# Altium PCB linkit-v4-0.3_6layers.PcbDoc (part 3 of 6)
Units mm, origin at the board's own origin, x right, y up, seen from the top; angles counter-clockwise.
Board outline 70 x 35 mm, 6 copper layers (Top Layer, Int1 (GND), Int2 (Sign), Int3 (Sign), Int4 (PWR), Bottom Layer), stack 1.551 mm thick; 185 components, 156 nets, 761 pads, 1071 vias.
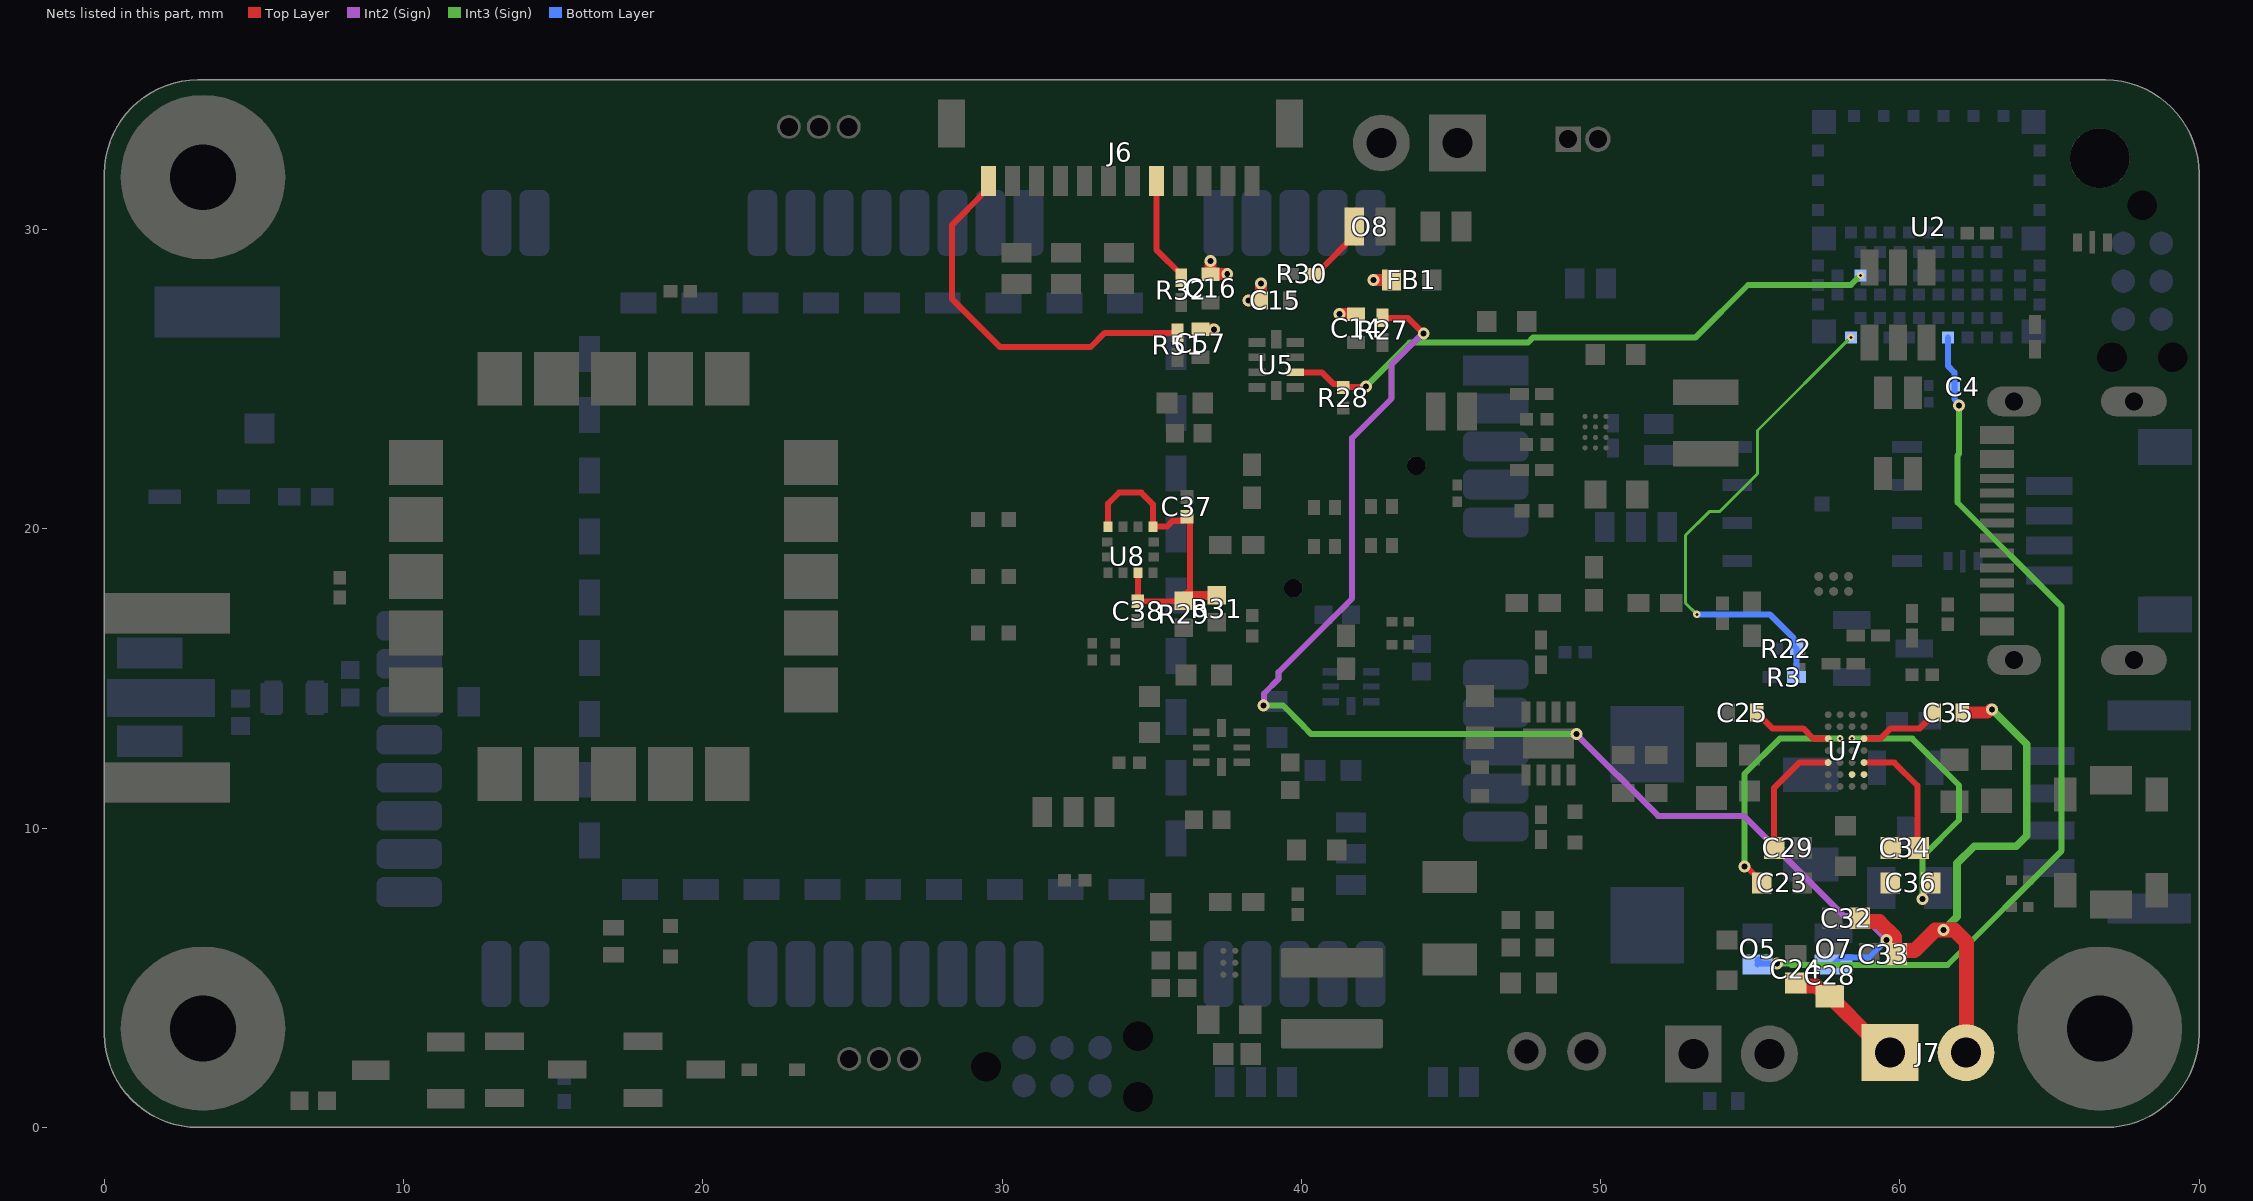
[diagram p6: the nets of this part, all layers, seen from the top]

## Part data (continued)
R18 R19 R20 R21 R22: "Thick Film Resistors - SMD 10 MOhms 50mW 0201 1%", Manufacturer_Name=KEMET, Mouser Part Number=603-RC0201FR-0710ML, Arrow Part Number=RC0201FR-0710ML, Arrow Price/Stock=https://www.arrow.com/en/products/rc0201fr-0710ml/yageo, Datasheet Link=http://www.yageo.com/documents/recent/PYu-RC0201_51_RoHS_L_8.pdf, Height=0.26mm, Manufacturer_Part_Number=RC0201FR-0710ML, Mouser Price/Stock=https://www.mouser.com/Search/Refine.aspx?Keyword=603-RC0201FR-0710ML
R23: library part "RES 750R 0201 1% 100PPM", "RES 750R 0201 1% 100PPM", Supplier Part Number 1=71-CRCW0201750RFKED, Tolerance=1%, PPM=100, Size=0201, Supplier 1=Mouser, Supplier 2=Digi-Key, Supplier Part Number 2=541-750AABCT-ND
R24: library part "RES 330R 0201 1% 100PPM", "RES 330R 0201 1% 100PPM", Supplier Part Number 1=71-CRCW0201330RFKED, Tolerance=1%, PPM=100, Size=0201, Supplier 1=Mouser, Supplier 2=Digi-Key, Supplier Part Number 2=541-330AABCT-ND
R25: library part "RES 1.6K 0201 1% 100PPM", "RES 1.6K 0201 1% 100PPM", Supplier Part Number 1=71-CRCW02011K60FKED, Tolerance=1%, PPM=100, Size=0201, Supplier 1=Mouser, Supplier 2=Digi-Key, Supplier Part Number 2=541-1.60KAABCT-ND
R26: library part RES-NC-0402, "Generic Resistor, Not Fitted", Manufacturer=YAGEO, Manufacturer_Part_Number=RC0402JR-070RL, Package=R0402, ComponentLink1Description=Datasheet, ComponentLink1URL=http://tunmcdsvn.tun.st.com/Component_Datasheet_Library/Trunk/Resistors/Yageo_Resistor_RC0402-series, Initial_Board_Reference=MB1274, Internal_Part_Number=MCD-00052, part_type=Resistor, Provided_By=SUBCO, status=Released
R31: library part "RES 0R 0402", "RES 0R 0402", Supplier Part Number 1=603-RC0402JR-070RL, Size=0402, Supplier 1=Mouser, Supplier 2=Digi-Key, Supplier Part Number 2=311-0.0JRCT-ND
R33 R34: "Thick Film Resistors - SMD 1/20watt 5.1Kohms 5% 200ppm", Manufacturer_Name=Vishay, Mouser Part Number=71-CRCW02015K10JNED, Datasheet Link=http://www.vishay.com/docs/20035/dcrcwe3.pdf, Height=0.28mm, Manufacturer_Part_Number=CRCW02015K10JNED, Mouser Price/Stock=https://www.mouser.com/Search/Refine.aspx?Keyword=71-CRCW02015K10JNED
R35: library part CRCW04020000Z0EEHP, "Thick Film Resistors - SMD CRCW 402 jumper", Manufacturer_Name=Vishay, Mouser Part Number=71-CRCW04020000Z0EEH, Arrow Part Number=CRCW04020000Z0EEHP, Arrow Price/Stock=https://www.arrow.com/en/products/crcw04020000z0eehp/vishay?utm_currency=USD&region=nac, Datasheet Link=http://www.vishay.com/docs/20035/dcrcwe3.pdf, Height=0.4mm, Manufacturer_Part_Number=CRCW04020000Z0EEHP, Mouser Price/Stock=https://www.mouser.co.uk/ProductDetail/Vishay-Dale/CRCW04020000Z0EEHP?qs=Imq1NPwxi74NTc567q7flQ%3D%3D
R36: "Res Thick Film 0201 453 Ohm 1% 1/20W ±100ppm/°C Molded SMD SMD Paper T/R", Case Code (Imperial)=0201, Case Code (Metric)=0603, Manufacturer="Vishay Dale", Manufacturer Part Number=CRCW0201453RFKED, Manufacturer_Name=Vishay, Max Operating Temperature=155°C, Max Power Dissipation=50mW, Min Operating Temperature=-55°C, Mouser Part Number=71-CRCW020120K0FKED, Package Quantity=10000, Supplier Part Number=71-CRCW0201453RFKED, Temperature Coefficient=100ppm/°C, Tolerance=1%, Voltage Rating=30V, Arrow Part Number=CRCW020120K0FKED, Arrow Price/Stock=https://www.arrow.com/en/products/crcw020120k0fked/vishay, Case/Package=0201, Category="Chip SMD Resistors", ComponentLink1Description=https://datasheet.ciiva.com/8935/crcw0201e3-8935846.pdf?src-supplier=Avnet, ComponentLink1URL=https://datasheet.ciiva.com/8935/crcw0201e3-8935846.pdf?src-supplier=Avnet, ComponentLink2Description=https://datasheet.ciiva.com/2580/crcw0201e3-2580478.pdf?src-supplier=Digikey, ComponentLink2URL=https://datasheet.ciiva.com/2580/crcw0201e3-2580478.pdf?src-supplier=Digikey, Contact Plating=Tin, Datasheet Link=http://www.vishay.com/docs/20035/dcrcwe3.pdf, Height=0.28mm, Lead Free="Lead Free", Length=0.024inch, Manufacturer_Part_Number=CRCW020120K0FKED, Mouser Price/Stock=https://www.mouser.co.uk/ProductDetail/Vishay-Dale/CRCW020120K0FKED?qs=1%252BOKmYoxJmkUY7PW7c9G2g%3D%3D, Number of Terminations=2, Packaging="Tape and Reel", Power Rating=50mW, Pricing="1=0,21, 10=0,091, 50=0,091, 100=0,063, 1000=0,043, 10000=0,029 (USD)", Radiation Hardening=No, RoHS=Yes, RoHS Compliant=Yes, Series=CRCW, Stock=8250, Supplier=Mouser, Termination=SMD/SMT, Voltage Rating (DC)=30V, Weight=6E-06oz, Width=0.3mm
R37: "Thick Film Resistors - SMD 10 kOhms 50 mW 0201 1%", Manufacturer_Name=KEMET, Mouser Part Number=603-RC0201FR-7D10KL, Datasheet Link=http://www.yageo.com/documents/recent/PYu-RC0201_51_RoHS_L_8.pdf, Height=0.26mm, Manufacturer_Part_Number=RC0201FR-7D10KL, Mouser Price/Stock=https://www.mouser.co.uk/ProductDetail/YAGEO/RC0201FR-7D10KL?qs=F5EMLAvA7ICAEt2%2Fo%2FBSlA%3D%3D
R38: "Thick Film Resistors - SMD 0201 255ohm 1% HalogenFree AEC-Q200", Manufacturer_Name=Panasonic, Datasheet Link=https://industrial.panasonic.com/cdbs/www-data/pdf/RDA0000/AOA0000C301.pdf, Height=0.26mm, Manufacturer_Part_Number=ERJ-1GNF2550C
R39: "Thick Film Resistors - SMD 1/20watt 196ohms 1% 100ppm"
R40 R42: "Thick Film Resistors - SMD 1/20watt 470ohms 1% 200ppm", Manufacturer_Name=Panasonic, Mouser Part Number=667-ERJ-U02F4700X, Datasheet Link=https://industrial.panasonic.com/cdbs/www-data/pdf/RDP0000/AOA0000C334.pdf, Height=0.4mm, Manufacturer_Part_Number=ERJ-U02F4700X, Mouser Price/Stock=https://www.mouser.co.uk/ProductDetail/Panasonic/ERJ-U02F4700X?qs=CBysBIMljtjEviQOZxHkmQ%3D%3D
R41: "Thick Film Resistors - SMD 1/16watt 3.3Kohms 1% 100ppm", Manufacturer_Name=Vishay, Mouser Part Number=71-CRCW0402-3.3K-E3, Arrow Part Number=CRCW04023K30FKED, Arrow Price/Stock=https://www.arrow.com/en/products/crcw04023k30fked/vishay, Datasheet Link=http://www.vishay.com/docs/20035/dcrcwe3.pdf, Height=0.4mm, Manufacturer_Part_Number=CRCW04023K30FKED, Mouser Price/Stock=https://www.mouser.co.uk/ProductDetail/Vishay-Dale/CRCW04023K30FKED?qs=iv%252Be0Bc5VY2uvlCcTQHBWQ%3D%3D
R43 R44: "Thick Film Resistors - SMD 1/20watt 22ohms 1% 200ppm", Manufacturer_Name=Panasonic, Datasheet Link=https://industrial.panasonic.com/cdbs/www-data/pdf/RDP0000/AOA0000C334.pdf, Height=0.4mm, Manufacturer_Part_Number=ERJ-U02F22R0X
R45: "Thick Film Resistors - SMD 36.5Kohm 1% 200ppm", Manufacturer_Name=Vishay, Datasheet Link=http://www.vishay.com/docs/20035/dcrcwe3.pdf, Height=0.28mm, Manufacturer_Part_Number=CRCW020136K5FNED
R46 R49: "Thick Film Resistors - SMD 0 Ohms 50mW 0201 1%", Manufacturer_Name=KEMET, Mouser Part Number=603-RC0201FR-070RL, Arrow Part Number=RC0201FR-070RL, Arrow Price/Stock=https://www.arrow.com/en/products/rc0201fr-070rl/yageo?region=nac, Datasheet Link=http://www.yageo.com/documents/recent/PYu-RC0201_51_RoHS_L_8.pdf, Height=0.26mm, Manufacturer_Part_Number=RC0201FR-070RL, Mouser Price/Stock=https://www.mouser.co.uk/ProductDetail/YAGEO/RC0201FR-070RL?qs=LWWr1WFOkdETHfAClQk8Xg%3D%3D
R47: "Thick Film Resistors - SMD 1/20W 2.74Kohms 1% 200ppm", Manufacturer_Name=Vishay, Datasheet Link=http://www.vishay.com/docs/20035/dcrcwe3.pdf, Height=0.28mm, Manufacturer_Part_Number=CRCW02012K74FNED
R48: "Thick Film Resistors - SMD 1/20watt 100Kohms 5% 200ppm", Manufacturer_Name=Vishay, Mouser Part Number=71-CRCW0201100KJNED, Arrow Part Number=CRCW0201100KJNED, Arrow Price/Stock=https://www.arrow.com/en/products/crcw0201100kjned/vishay, Datasheet Link=http://www.vishay.com/docs/20035/dcrcwe3.pdf, Height=0.28mm, Manufacturer_Part_Number=CRCW0201100KJNED, Mouser Price/Stock=https://www.mouser.co.uk/ProductDetail/Vishay-Dale/CRCW0201100KJNED?qs=IQLUlsvFoXu8A8gHIw6owA%3D%3D
R50: "Thick Film Resistors - SMD 1/16watt 49.9Kohms 1%", Manufacturer_Name=Vishay, Mouser Part Number=71-CRCW0402-49.9K-E3, Arrow Part Number=CRCW040249K9FKED, Arrow Price/Stock=https://www.arrow.com/en/products/crcw040249k9fked/vishay?region=nac, Datasheet Link=http://www.vishay.com/docs/20035/dcrcwe3.pdf, Height=0.4mm, Manufacturer_Part_Number=CRCW040249K9FKED, Mouser Price/Stock=https://www.mouser.co.uk/ProductDetail/Vishay-Dale/CRCW040249K9FKED?qs=hAuyw6LW%252BLhwjtjsHx%2FGDQ%3D%3D
R52 R53 R54 R55 R56: "Thick Film Resistors - SMD CRCW 402 jumper", Manufacturer_Name=Vishay, Mouser Part Number=71-CRCW04020000Z0EEH, Arrow Part Number=CRCW04020000Z0EEHP, Arrow Price/Stock=https://www.arrow.com/en/products/crcw04020000z0eehp/vishay?utm_currency=USD&region=nac, Datasheet Link=http://www.vishay.com/docs/20035/dcrcwe3.pdf, Height=0.4mm, Manufacturer_Part_Number=CRCW04020000Z0EEHP, Mouser Price/Stock=https://www.mouser.co.uk/ProductDetail/Vishay-Dale/CRCW04020000Z0EEHP?qs=Imq1NPwxi74NTc567q7flQ%3D%3D
SW1: "Board Mount Hall Effect/Magnetic Sensors Integrated Digital Omnipolar, TMR, High Sensitivity Magnetic Switch, SOT23 Package, Ind Temp, 2Hz", Manufacturer_Name="Allegro MicroSystems", Mouser Part Number=462-CT8132BV-IS3, Datasheet Link=https://www.mouser.fr/datasheet/2/1115/Allegro_DS_CT813x_Datasheet_GS_FINAL_R2_v2-3441103.pdf, Height=1.4mm, Manufacturer_Part_Number=CT8132BV-IS3, Mouser Price/Stock=https://www.mouser.fr/ProductDetail/Allegro-MicroSystems/CT8132BV-IS3?qs=GBLSl2Akirsc7cUAudCqXg%3D%3D
SW2: "SW SPST PB 50MA 12V SMT CK variant", Manufacturer=C&K, Manufacturers Part Number="PTS820J2xM SMTR LFS", Supplier Part Number 1=611-PTS820J25MSMTR, Distributor 1=EBV, Distributor 2="Future Electronics", Supplier 1=Mouser, Supplier 2=Digi-Key, Supplier Part Number 2=CKN10505CT-ND
U1: "Battery Management 800-mA linear batter y charger for one-ce", Manufacturer_Name="Texas Instruments", Mouser Part Number=595-BQ25176MDSGR, Arrow Part Number=BQ25176MDSGR, Arrow Price/Stock=https://www.arrow.com/en/products/bq25176mdsgr/texas-instruments?region=nac, Datasheet Link=https://www.ti.com/lit/gpn/bq25176m, Height=0.8mm, Manufacturer_Part_Number=BQ25176MDSGR, Mouser Price/Stock=https://www.mouser.co.uk/ProductDetail/Texas-Instruments/BQ25176MDSGR?qs=Y0Uzf4wQF3nVhcdITj52nA%3D%3D
U2: "IC ISP Smart Bluetooth Module", Manufacturer=InsightSIP, Manufacturers Part Number=ISP1807-LR-ST, Temp Max=85, Temp Min=-40, Supplier 1=Rutronik, Supplier 2=Mouser, Supplier Part Number 1=ISP1807-LR-ST, Supplier Part Number 2=359-ISP1807-LR-ST, Supplier Unit Price 1=8.5
U3: "IC MEM SERIAL NOR FLASH QSPI 128Mb/16MB 3.6V 166MHz WSON8 6X5", Manufacturer=ISSI, Supplier Part Number 1=2901145, Temp Max=105, Temp Min=-40, Distributor 1=EBV, Distributor 2="Future Electronics", Manufacturers Part Number=IS25LP128F-JKLE, Supplier 1=Farnell, Supplier 2=Mouser, Supplier Part Number 2=870-IS25LP128FJKLETR
U4 U12: "Power Switch ICs - Power Distribution Low Input VTG Dual L oad Switch", Manufacturer_Name="Texas Instruments", Mouser Part Number=595-TPS22960RSER, Arrow Part Number=TPS22960RSER, Arrow Price/Stock=https://www.arrow.com/en/products/tps22960rser/texas-instruments?region=nac, Datasheet Link=https://www.ti.com/lit/ds/symlink/tps22960.pdf?ts=1638681846865&ref_url=https%253A%252F%252Fwww.google.com%252F, Height=0.6mm, Manufacturer_Part_Number=TPS22960RSER, Mouser Price/Stock=https://www.mouser.co.uk/ProductDetail/Texas-Instruments/TPS22960RSER?qs=EQxOuqCyzqQpKHLEcq5RSg%3D%3D
U5: "Analog to Digital Converters - ADC 16B ADC w/ Int MUX P GA Comp Osc & Ref A", Manufacturer_Name="Texas Instruments", Mouser Part Number=595-ADS1115IRUGR, Arrow Part Number=ADS1115IRUGR, Arrow Price/Stock=https://www.arrow.com/en/products/ads1115irugr/texas-instruments?utm_currency=USD&region=nac, Datasheet Link=https://www.ti.com/lit/ds/symlink/ads1115.pdf?ts=1601235703022&ref_url=https%253A%252F%252Fwww.ti.com%252Fproduct%252FADS1115%253FkeyMatch%253DADS1115IRUGR%2526tisearch%253DSearch-EN-everything%2526usecase%253DOPN, Height=0.4mm, Manufacturer_Part_Number=ADS1115IRUGR, Mouser Price/Stock=https://www.mouser.co.uk/ProductDetail/Texas-Instruments/ADS1115IRUGR?qs=IK5e5L0zOXhqw%2F8AHSSbuA%3D%3D
U6: "ESD Suppressors / TVS Diodes High Speed Interface Protection Low Cap", Manufacturer_Name=STMicroelectronics, Mouser Part Number=511-USBLC6-2SC6, Arrow Part Number=USBLC6-2SC6, Arrow Price/Stock=https://www.arrow.com/en/products/usblc6-2sc6/stmicroelectronics?utm_currency=USD&region=europe, Datasheet Link=http://www.st.com/st-web-ui/static/active/en/resource/technical/document/datasheet/CD00050750.pdf, Height=1.45mm, Manufacturer_Part_Number=USBLC6-2SC6, Mouser Price/Stock=https://www.mouser.co.uk/ProductDetail/STMicroelectronics/USBLC6-2SC6?qs=po45yt2pPpu%2FhNIlwQdTlg%3D%3D
U7: "Wireless Charging ICs Wireless Pwr Receivr A 595-BQ51003YFPR", Manufacturer_Name="Texas Instruments", Mouser Part Number=595-BQ51003YFPT, Arrow Part Number=BQ51003YFPT, Arrow Price/Stock=https://www.arrow.com/en/products/bq51003yfpt/texas-instruments?region=nac, Datasheet Link=http://www.ti.com/lit/gpn/BQ51003, Height=0.5mm, Manufacturer_Part_Number=BQ51003YFPT, Mouser Price/Stock=https://www.mouser.co.uk/ProductDetail/Texas-Instruments/BQ51003YFPT?qs=QCUnHQQYO1rX6GZ4rUhwCg%3D%3D
U8: "IC AXL Accel/temp SPI/I2C 12LGA", Manufacturer="Bosch Sensortec", Supplier Part Number 1=828-1081-1-ND, Temp Max=85, Temp Min=-40, Manufacturers Part Number=BMA400, Supplier 1=Digi-Key, Supplier 2=Mouser, Supplier Part Number 2=262-BMA400
U9: "GNSS / GPS Modules u-blox M10 GNSS antenna module ROM, TCXO, SAW, LNA LGA, 16x16 mm", Manufacturer_Name=U-Blox, Mouser Part Number=377-SAM-M10Q-00B, Datasheet Link=https://content.u-blox.com/sites/default/files/documents/SAM-M10Q_DataSheet_UBX-22013293.pdf, Height=6.8mm, Manufacturer_Part_Number=SAM-M10Q-00B, Mouser Price/Stock=https://www.mouser.co.uk/ProductDetail/u-blox/SAM-M10Q-00B?qs=vvQtp7zwQdOaA6LplTUKjg%3D%3D
U10: "Switching Voltage Regulators 5.5-V buck-boost con verter with 75-nA op", Manufacturer_Name="Texas Instruments", Mouser Part Number=595-TPS63901YCJR, Arrow Part Number=TPS63901YCJR, Arrow Price/Stock=https://www.arrow.com/en/products/tps63901ycjr/texas-instruments?region=nac, Datasheet Link=https://www.ti.com/lit/ds/symlink/tps63901.pdf?ts=1658737279065&ref_url=https%253A%252F%252Fwww.ti.com%252Fproduct%252FTPS63901%253FkeyMatch%253DTPS63901YCJR%2526tisearch%253Dsearch-everything%2526usecase%253DOPN, Height=0.35mm, Manufacturer_Part_Number=TPS63901YCJR, Mouser Price/Stock=https://www.mouser.co.uk/ProductDetail/Texas-Instruments/TPS63901YCJR?qs=vvQtp7zwQdNZy3FE2e2hqg%3D%3D
U11: "KIM2 Module 48 pins 1.27mm pitch 36.6 x 25.4 x 5mm", Manufacturer=Kineis, Rating=3.3-5V, Tolerance="-30 /  +55°C", BOI="SMD48 36.6x25.4x5mm", DESIG="KIMFLEX Module 48 pins 1.27mm pitch 36.6 x 25.4 x 5mm", K P/N=-, Manufacturer P/N=KIM2, Supplier=Kineis, Supplier P/N=KIMFLEX, VAL=KIM2
U13: "Arribada SMD module Argos comunication with PA GR5504"
U14: "Switching Voltage Regulators 95-nA low IQ 5.5-V b oost converter with INLIMIT (1.9A)", Manufacturer_Name="Texas Instruments", Mouser Part Number=595-TPS612997YBHR, Arrow Part Number=TPS612997YBHR, Arrow Price/Stock=https://www.arrow.com/en/products/tps612997ybhr/texas-instruments?utm_currency=USD&region=nac, Datasheet Link=https://www.ti.com/lit/gpn/tps61299, Height=0.4mm, Manufacturer_Part_Number=TPS612997YBHR, Mouser Price/Stock=https://www.mouser.co.uk/ProductDetail/Texas-Instruments/TPS612997YBHR?qs=mELouGlnn3dLhnQxUdz5hw%3D%3D

## Via types
v1: diameter 0.4, hole 0.2, Top Layer to Int1 (GND), tented both sides, 275 vias
v2: diameter 0.4 (per signal layer), hole 0.2, Int1 (GND) to Int2 (Sign), tented both sides, 205 vias
v3: diameter 0.4, hole 0.2, Int1 (GND) to Bottom Layer, tented both sides, 147 vias
v4: diameter 0.4/0.4 (per signal layer), hole 0.2, Int1 (GND) to Int3 (Sign), tented both sides, 103 vias
v5: diameter 0.4, hole 0.2, Int3 (Sign) to Bottom Layer, tented both sides, 48 vias
v6: diameter 0.4, hole 0.2, Top Layer to Int3 (Sign), tented both sides, 46 vias
v7: diameter 0.6, hole 0.3, Top Layer to Int4 (PWR), tented both sides, 38 vias
v8: diameter 0.4/0.4/0.4/0.4 (per signal layer), hole 0.2, Top Layer to Bottom Layer, tented both sides, 33 vias
v9: diameter 0.4, hole 0.2, Int1 (GND) to Int2 (Sign), tented both sides, 23 vias
v10: diameter 0.4, hole 0.2, Int2 (Sign) to Bottom Layer, tented both sides, 20 vias
v11: diameter 0.6, hole 0.3, Int4 (PWR) to Bottom Layer, tented both sides, 19 vias
v12: diameter 0.25, hole 0.1, Int2 (Sign) to Bottom Layer, tented both sides, 17 vias
v13: diameter 0.4, hole 0.2, Top Layer to Int2 (Sign), tented both sides, 16 vias
v14: diameter 0.25, hole 0.1, Int3 (Sign) to Bottom Layer, tented both sides, 14 vias
v15: diameter 0.5, hole 0.2, Top Layer to Bottom Layer, tented both sides, 12 vias
v16: diameter 0.4, hole 0.2, Int2 (Sign) to Int3 (Sign), tented both sides, 10 vias
v17: diameter 0.25, hole 0.1, Top Layer to Bottom Layer, tented both sides, 7 vias
v18: diameter 0.6, hole 0.3, Top Layer to Bottom Layer, tented both sides, 6 vias
v19: diameter 0.4, hole 0.2, Top Layer to Bottom Layer, tented both sides, 5 vias
v20: diameter 0.2, hole 0.1, Int2 (Sign) to Bottom Layer, tented both sides, 5 vias
v21: diameter 0.226, hole 0.1, Top Layer to Int3 (Sign), tented both sides, 5 vias
v22: diameter 0.2, hole 0.1, Int1 (GND) to Bottom Layer, tented both sides, 4 vias
v23: diameter 0.6, hole 0.3, Int1 (GND) to Bottom Layer, tented both sides, 3 vias
v24: diameter 0.3, hole 0.2, Top Layer to Int1 (GND), tented both sides, 3 vias
v25: diameter 0.6, hole 0.3, Int3 (Sign) to Bottom Layer, tented both sides, 2 vias
v26: diameter 0.6, hole 0.3, Top Layer to Int1 (GND), tented both sides, 1 vias
v27: diameter 0.4, hole 0.2, Int4 (PWR) to Bottom Layer, tented both sides, 1 vias
v28: diameter 0.6, hole 0.3, Top Layer to Int2 (Sign), tented both sides, 1 vias
v29: diameter 0.25, hole 0.1, Int1 (GND) to Bottom Layer, tented both sides, 1 vias
v30: diameter 0.169, hole 0.1, Top Layer to Int2 (Sign), tented both sides, 1 vias

## Nets (pads, with @x,y where several pads share a name; then routed paths per layer and width w, separated by ;. In a path a pad name is that pad's centre, name@x,y a point inside that pad or via, vN(x,y) a via of type N, cw(c..) or ccw(c..) an arc to the next point about the centre after c; other vN are vias at no path point)
ADC0: O7.2 R27.1 | length 42.4
  Top Layer w0.2: R27.1@42.718,27.052 43.56,27.052 44.077,26.535 v13(44.09,26.535)
  Int2 (Sign) w0.2: v16(38.735,14.097) 38.754,14.116 38.754,14.5 39.243,14.989 39.243,15.216 41.699,17.672 41.699,23.037 43.019,24.357 43.019,25.493 44.061,26.535 v13(44.09,26.535) ; v16(49.19,13.144) 51.92,10.414 54.78,10.414 58.135,7.059 58.77,7.059 v10(59.559,6.27)
  Int3 (Sign) w0.2: v16(38.735,14.097) 39.389,14.097 40.095,13.392 40.095,13.38 40.33,13.144 v16(49.19,13.144)
  Bottom Layer w0.2: O7.2@57.785,5.448 58.015,5.679 58.968,5.679 v10(59.559,6.27)
ADC1: O8.2 R30.1 | length 2.2
  Top Layer w0.2: R30.1@40.428,28.522 40.541,28.522 40.641,28.622 40.641,28.664 41.77,29.794 O8.2@41.77,30.099
ADC2: J6.5 R32.1 | length 3.6
  Top Layer w0.2: J6.5@35.154,31.623 35.154,29.332 35.987,28.499 R32.1@35.987,28.387
ADC3: J6.12 R51.1 | length 12.9
  Top Layer w0.2: J6.12@29.554,31.623 29.554,31.373 29.404,31.223 29.392,31.223 28.33,30.161 28.33,27.677 29.937,26.07 32.954,26.07 33.436,26.552 R51.1@35.864,26.552
ADC_ALERT_RDY: R28.2 U2.64 U5.2 | length 20.7
  Top Layer w0.2: U5.2@39.797,25.228 40.685,25.228 41.069,24.844 41.292,24.844 R28.2@41.402,24.734 ; R28.2@41.402,24.724 R28.2@41.402,24.734 ; v6(42.164,24.765) 42.143,24.744 41.413,24.744 R28.2@41.402,24.734
  Int3 (Sign) w0.2: v6(42.164,24.765) 43.622,26.223 47.572,26.223 47.747,26.398 53.173,26.398 54.924,28.149 58.36,28.149 v14(58.685,28.474)
AGND: C14.2 C15.2 C16.2 C57.2 FB1.1 | length 3.6
  Top Layer w0.4: C57.2@36.626,26.678 36.634,26.67 v1(37.084,26.67) ; v1(36.957,28.956) 36.957,28.523 C16.2@36.967,28.513 v1(37.524,28.513) ; v1(38.227,27.633) C15.2@38.654,27.633 v1(38.654,28.194) ; v1(41.275,27.178) C14.2@41.829,27.178 ; v1(42.418,28.321) FB1.1@43.013,28.321
BAT_AN: C4.2 O5.1 U2.38 | length 30.6
  Int3 (Sign) w0.2: v5(55.899,5.48) 56.335,5.48 56.385,5.43 61.589,5.43 65.405,9.246 65.405,17.399 61.924,20.88 61.924,22.452 61.976,22.504 v5(61.976,24.13)
  Bottom Layer w0.2: O5.1@55.245,5.448 55.277,5.48 v5(55.899,5.48) ; O5.1@55.245,5.575 O5.1@55.285,5.616 ; U2.38@61.61,26.399 61.61,25.436 61.824,25.222 C4.2@61.824,24.752 61.824,24.336 61.976,24.184 v5(61.976,24.13)
BAT_READ_EN: R3.2 R22.2 U2.48 | length 16.8
  Int3 (Sign) w0.1: v14(53.213,17.145) 52.84,17.518 52.84,19.786 53.628,20.574 53.975,20.574 55.245,21.844 55.245,23.284 v14(58.36,26.399)
  Bottom Layer w0.2: v14(53.213,17.145) 55.654,17.145 56.44,16.359 56.44,16.108 R22.2@56.546,16.002 R3.2@56.546,15.047
BMA_PWR: C37.2 C38.2 R29.1 R31.2 U8.3 U8.7 U8.10 | length 11.2
  Top Layer w0.2: U8.10@33.54,20.079 33.54,20.843 33.906,21.209 34.654,21.209 35.04,20.823 U8.7@35.04,20.079 35.515,20.079 35.705,20.269 36.015,20.269 36.025,20.279 36.069,20.279 36.179,20.389 C37.2@36.179,20.409 ; U8.3@34.54,18.529 34.54,17.586 C38.2@34.537,17.582 35.872,17.582 R29.1@35.977,17.686 ; R29.1@36.068,17.595 36.068,17.686 36.068,17.739 36.275,17.946 36.275,20.229 C37.2@36.137,20.367
  Top Layer w0.3: R29.1@36.068,17.595 36.068,17.717 36.129,17.778 R31.2@37.173,17.778
BOOT1: C29.2 U7.C4 | length 4.2
  Top Layer w0.2: C29.2@55.798,9.328 C29.2@55.798,9.338 55.798,11.348 56.642,12.192 U7.C4@57.601,12.192
BOOT2: C34.2 U7.C1 | length 4.2
  Top Layer w0.2: U7.C1@58.801,12.192 59.817,12.192 60.582,11.427 C34.2@60.582,9.328
CLAMP1: C23.2 U7.E3 | length 7.6
  Top Layer w0.2: v6(54.809,8.713) 54.847,8.675 54.906,8.675 55.388,8.193 C23.2@55.388,8.168
  Int3 (Sign) w0.2: v6(54.809,8.713) 54.809,11.813 55.988,12.992 v21(58.001,12.992)
CLAMP2: C36.2 U7.E2 | length 9.2
  Top Layer w0.2: v6(60.759,7.627) 60.759,7.681 60.804,7.726 60.804,7.918 61.029,8.143 C36.2@61.029,8.168
  Int3 (Sign) w0.2: v21(58.401,12.992) 60.414,12.992 61.976,11.43 61.976,10.272 60.759,9.055 v6(60.759,7.627)
COIL-1: C24.1 C28.1 J7.1 | length 4.2
  Top Layer w0.5: C24.1@56.515,4.826 56.61,4.731 57.212,4.731 57.563,4.38 C28.1@57.658,4.38 57.753,4.38 57.878,4.255 57.878,4.16 58.839,3.199 58.97,3.199 J7.1@59.67,2.499
COIL-2: C32.1 C33.1 C34.1 C35.1 C36.1 J7.2 U7.B1 U7.B2 | length 19.4
  Top Layer w0.4: C35.1@62.09,13.862 62.928,13.862 63.027,13.961 v6(63.081,13.961)
  Top Layer w0.5: C32.1@58.661,6.987 58.661,6.972 58.756,6.877 59.312,6.877 59.825,6.364 59.825,5.866 C33.1@59.896,5.795 59.896,5.81 59.991,5.905 60.491,5.905 61.18,6.594 v6(61.453,6.594) 61.819,6.594 62.23,6.182 62.23,2.519 J7.2@62.21,2.499
  Int3 (Sign) w0.254: v6(61.453,6.594) 61.907,7.048 61.907,8.821 62.478,9.392 63.881,9.392 64.235,9.745 64.235,12.807 v6(63.081,13.961)
COMM1: C25.2 U7.E4 | length 2.7
  Top Layer w0.2: C25.2@55.212,13.862 55.739,13.335 56.769,13.335 57.112,12.992 U7.E4@57.601,12.992
COMM2: C35.2 U7.E1 | length 2.7
  Top Layer w0.2: U7.E1@58.801,12.992 59.347,12.992 59.69,13.335 60.663,13.335 C35.2@61.19,13.862